# EAGLE board Glove Module- V1_2 (EAGLE 6.6.0)
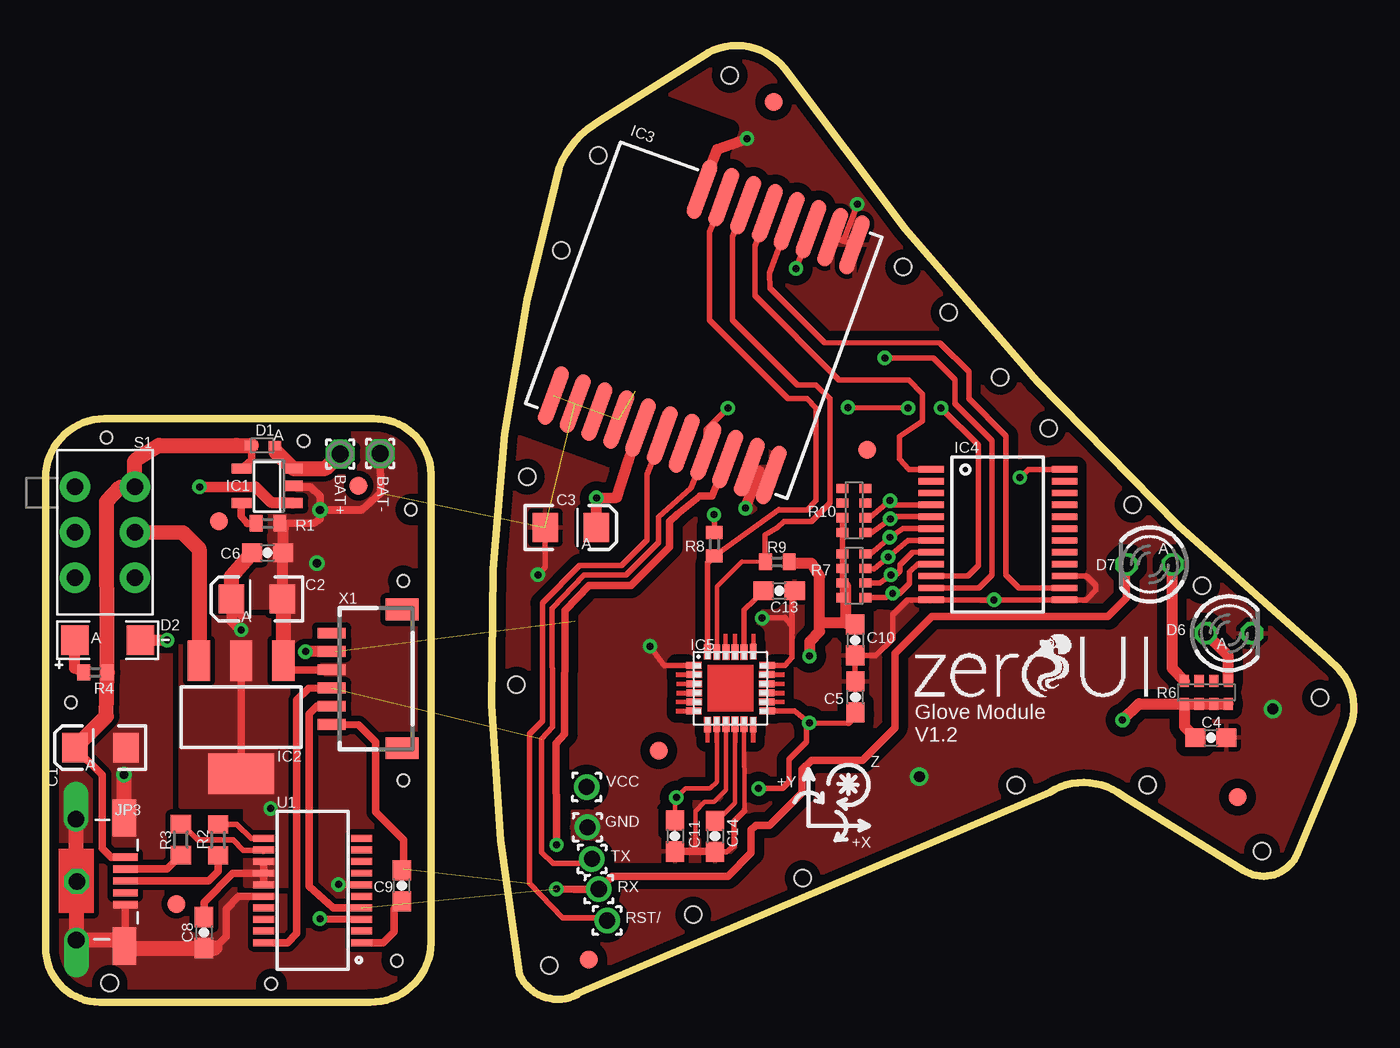
[diagram p0: board, top side]
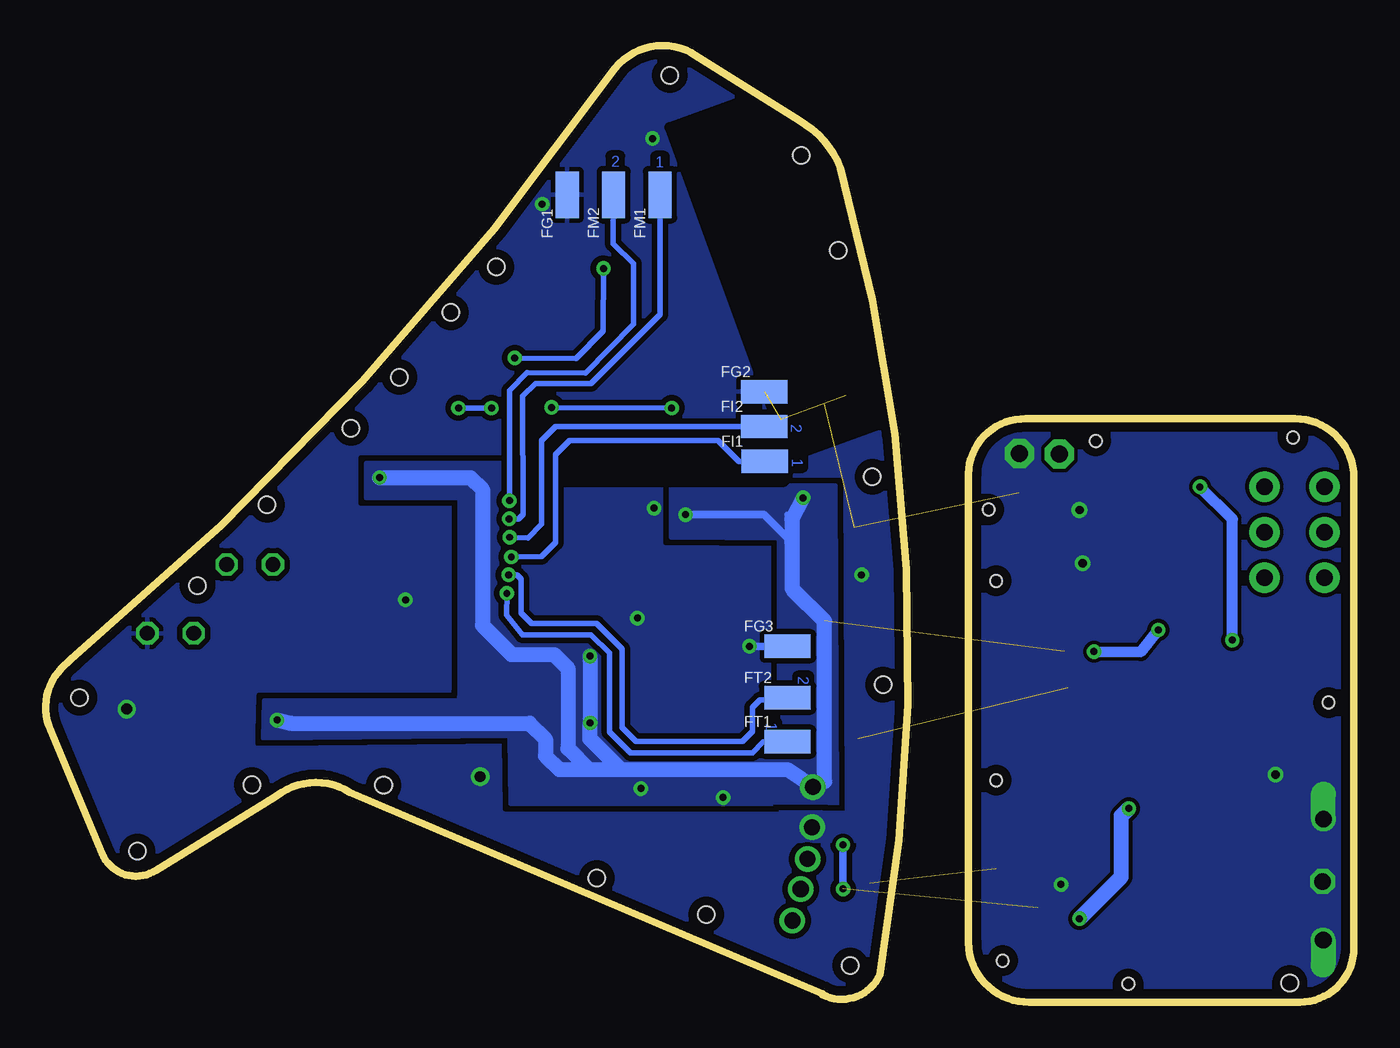
[diagram p1: board, bottom side, seen from below]

Size 71.69 x 52.42 mm. Coordinates in mm from the lower left corner, seen from the top.
Outline: 36.28,52.05 arc-77 40.48,51.2 arc15 70.31,18.77 70.82,18.28 arc-69 71.42,14.9 68.6,8.14 arc-101 65.63,7.24 59.02,11.3 arc71 55.02,11.5 29.12,0.45 29.11,0.41 arc-92 25.98,1.5 arc-26 28.13,45.7 arc-39 30.42,48.33 36.33,52.05
Outline: 21.12,3.26 21.12,28.95 arc90 17.97,31.98 3.23,31.98 arc90 0,28.75 0,2.97 arc90 2.97,0 17.77,0 arc90 21.12,3.26
Copper layers (1*16): Top 0.035mm / dielectric 1.5mm / Bottom 0.035mm
Design rules "8mils": minimum track width 8mil, minimum drill 0.6mm, track to track 8mil, track to pad 8mil, pad to pad 8mil, via to via 8mil, smd to smd 0mil, copper to edge 20mil, drill to drill 10mil, minimum pad ring 8mil, minimum via ring 8mil, stop-mask expansion 0mil, vias tented up to drill 0mil, thermal gap 10mil
Holes 0.66 mm at 19.25,2.27 1.39,16.42 19.61,23.09 12.37,1 3.34,30.94 20.01,27 14.15,30.76 19.61,12.17
Holes 0.91 mm at 3.51,1.04 27.6,2.02 25.8,17.41 26.39,28.8 30.29,46.41 37.48,50.8 49.48,37.8 54.95,31.46 46.99,40.29 52.31,34.25 59.56,27.26 63.37,22.83 69.83,16.69 66.66,8.27 60.38,11.91 53.17,11.88 41.48,6.8 35.48,4.8 28.27,41.21
tRestrict: area 23.9,29.8 to 37.5,50.4; area 52.4,21.9 to 52.9,22.7; area 37.3,9.1 to 38.4,9.8; area 12.2,27.9 to 13,28.8; 4 lines
bRestrict: area 23.9,29.9 to 37.5,50.5; 7 lines

## Footprints (pad centres in the part's own frame; a part is rotated, then mirrored left to right if it is on the bottom)
1,6/0,9 = drill 0.914 pad 1.6 octagon: 1 0,0
EIA3216 = smd 1.4 x 1.6: A 1.4,0; C -1.4,0
0603-CAP = smd 1.1 x 1: 1 -0.85,0; 2 0.85,0
SOD523 = smd 0.7 x 0.5: A 0.7,0; C -0.6,0
LED-1206-BOTTOM = smd 1.5 x 1.6: A -1.8,0; C 1.8,0
LED3MM = drill 0.813 octagon: A -1.27,0; K 1.27,0
WIREPAD-SMD = smd 1.27 x 2.54: 1 0,0
FIDUCIAL-1X2 = smd 1 x 1: 1 0,0
WIREPAD-15MIL = drill 0.889 pad 1.397: 1 0,0
SOT23-5 = smd 0.55 x 1.1: 1 -0.95,-1.3; 2 0,-1.3; 3 0.95,-1.3; 4 0.95,1.5; 5 -0.95,1.5
SOT223 = smd 1.219 x 2.235: 1 -2.311,-3.099; 2 0,-3.099; 3 2.311,-3.099 | smd 3.6 x 2.2: 4 0,3.099
RFD22301 = smd 3.353 x 0.813: 1 0,0; 2 0,-1.27; 3 0,-2.54; 4 0,-3.81; 5 0,-5.08; 6 0,-6.35; 7 0,-7.62; 8 0,-8.89; 9 13.411,-12.675; 10 13.411,-11.405; 11 13.411,-10.135; 12 13.411,-8.865; 13 13.411,-7.595; 14 13.411,-6.325; 15 13.411,-5.055; 16 13.411,-3.785; 17 13.411,-2.515; 18 13.411,-1.245; 19 13.411,0.025
SSOP24 = smd 0.348 x 1.397: 1 -3.575,-3.656; 2 -2.925,-3.656; 3 -2.275,-3.656; 4 -1.625,-3.656; 5 -0.975,-3.656; 6 -0.325,-3.656; 7 0.325,-3.656; 8 0.975,-3.656; 9 1.625,-3.656; 10 2.275,-3.656; 11 2.925,-3.656; 12 3.575,-3.656; 13 3.575,3.656; 14 2.925,3.656; 15 2.275,3.656; 16 1.625,3.656; 17 0.975,3.656; 18 0.325,3.656; 19 -0.325,3.656; 20 -0.975,3.656; 21 -1.625,3.656; 22 -2.275,3.656; 23 -2.925,3.656; 24 -3.575,3.656
QFN.24.4X4 = smd 0.85 x 0.38: 1 -2.007,1.25; 2 -1.975,0.75; 3 -1.975,0.25; 4 -1.975,-0.25; 5 -1.975,-0.75; 6 -2.007,-1.25; 13 2.007,-1.25; 14 1.975,-0.75; 15 1.975,-0.25; 16 1.975,0.25; 17 1.975,0.75; 18 2.007,1.25 | smd 0.38 x 0.85: 7 -1.25,-2.007; 8 -0.75,-1.975; 9 -0.25,-1.975; 10 0.25,-1.975; 11 0.75,-1.975; 12 1.25,-2.007; 19 1.25,2.007; 20 0.75,1.975; 21 0.25,1.975; 22 -0.25,1.975; 23 -0.75,1.975; 24 -1.25,2.007
USB-MICRO-MOLEX-105017-0001 = smd 0.4 x 1.35: 1 -1.34,1.27; 2 -0.69,1.27; 3 -0.04,1.27; 4 0.61,1.27; 5 1.26,1.27 | smd 2.032 x 1.27: P$1 -3.505,1.219; P$6 3.531,1.219 | drill 0.914 octagon: P$2 -0.008,-1.382 | drill 0.914 offset: P$7 -3.434,-1.433; P$8 3.198,-1.418
R0402 = smd 0.7 x 0.9: 1 -0.65,0; 2 0.65,0
R0603 = smd 1 x 1.1: 1 -0.85,0; 2 0.85,0
0603-ARV = smd 0.5 x 0.65: 1 -1.2,-0.625; 2 -0.4,-0.625; 3 0.4,-0.625; 4 1.2,-0.625; 5 1.2,0.625; 6 0.4,0.625; 7 -0.4,0.625; 8 -1.2,0.625
SWITCH-SPDT = drill 0.9 pad 1.676: 1 -2.559,1.579; 2 -0.059,1.579; 3 2.441,1.579; 4 -2.559,-1.721; 5 -0.059,-1.721; 6 2.441,-1.721
SSOP20_L = smd 0.381 x 1.143: 1 -2.857,-2.68; 2 -2.223,-2.68; 3 -1.587,-2.68; 4 -0.953,-2.68; 5 -0.318,-2.68; 6 0.318,-2.68; 7 0.953,-2.68; 8 1.587,-2.68; 9 2.223,-2.68; 10 2.857,-2.68; 11 2.857,2.68; 12 2.223,2.68; 13 1.587,2.68; 14 0.953,2.68; 15 0.318,2.68; 16 -0.318,2.68; 17 -0.953,2.68; 18 -1.587,2.68; 19 -2.223,2.68; 20 -2.857,2.68
SM06B-SRSS-TB = smd 0.6 x 1.55: 1 -2.5,2.975; 2 -1.5,2.975; 3 -0.5,2.975; 4 0.5,2.975; 5 1.5,2.975; 6 2.5,2.975 | smd 1.2 x 1.8: FIT@1 -3.8,-0.9; FIT@2 3.8,-0.9

## Placement (x,y rotation side)
BAT+  Bat+  [1,6/0,9]  16.13,30.04 270 top
BAT-  Bat-  [1,6/0,9]  18.33,30.07 270 top
C1  10uF  [EIA3216]  3,13.94 180 top
C2  10uF  [EIA3216]  11.58,22.1 180 top
C3  10uF  [EIA3216]  28.78,26.01 0 top
C4  0.1uF  [0603-CAP]  63.86,14.5 0 top
C5  0.1uF  [0603-CAP]  44.38,16.73 90 top
C6  0.1uF  [0603-CAP]  12.17,24.63 0 top
C8  0.1uF  [0603-CAP]  8.68,3.81 270 top
C9  0.1uF  [0603-CAP]  19.52,6.38 90 top
C10  0.1uF  [0603-CAP]  44.36,19.85 270 top
C11  10nF  [0603-CAP]  34.48,9.1 270 top
C13  2.2nF  [0603-CAP]  40.2,22.55 0 top
C14  0.1uF  [0603-CAP]  36.68,9.09 270 top
D1  PMEG3005EB  [SOD523]  11.87,30.52 0 top
D2  Green  [LED-1206-BOTTOM]  3.4,19.84 0 top
D6  Green  [LED3MM]  64.85,20.22 0 top
D7  Red  [LED3MM]  60.5,23.99 180 top
FG1  [WIREPAD-SMD]  43.1,44.25 0 bottom
FG2  [WIREPAD-SMD]  32.31,33.45 270 bottom
FG3  [WIREPAD-SMD]  31.04,19.51 270 bottom
FI1  [WIREPAD-SMD]  32.28,29.64 270 bottom
FI2  [WIREPAD-SMD]  32.31,31.55 270 bottom
FID1  FIDUCIAL1X2  [FIDUCIAL-1X2]  17.14,28.3 270 top
FID2  FIDUCIAL1X2  [FIDUCIAL-1X2]  7.16,5.38 270 top
FID3  FIDUCIAL1X2  [FIDUCIAL-1X2]  65.33,11.23 0 top
FID4  FIDUCIAL1X2  [FIDUCIAL-1X2]  33.59,13.78 270 top
FID5  FIDUCIAL1X2  [FIDUCIAL-1X2]  9.5,26.34 0 top
FID6  FIDUCIAL1X2  [FIDUCIAL-1X2]  39.9,49.35 0 top
FID7  FIDUCIAL1X2  [FIDUCIAL-1X2]  29.77,2.34 0 top
FID8  FIDUCIAL1X2  [FIDUCIAL-1X2]  45.01,30.28 0 top
FM1  [WIREPAD-SMD]  38.02,44.25 0 bottom
FM2  [WIREPAD-SMD]  40.56,44.25 0 bottom
FT1  [WIREPAD-SMD]  31.04,14.27 270 bottom
FT2  [WIREPAD-SMD]  31.04,16.69 270 bottom
GND  [WIREPAD-15MIL]  29.69,9.58 0 top
IC1  MCP73831  [SOT23-5]  12.24,28.3 90 top
IC2  AZ1117CH-3.3TRG1  [SOT223]  10.72,15.62 180 top
IC3  RF22301  [RFD22301]  44.32,41.5 250 top
IC4  MUX-74HC4067SMD  [SSOP24]  52.17,25.63 270 top
IC5  MPU-6050  [QFN.24.4X4]  37.53,17.2 0 top
JP3  USB-CON-5PIN-105017-0001  [USB-MICRO-MOLEX-105017-0001]  3.1,6.6 270 top
R1  10k  [R0402]  12.19,26.24 180 top
R2  27E  [R0603]  9.45,8.89 270 top
R3  27E  [R0603]  7.41,8.9 270 top
R4  10k  [R0402]  2.73,18.07 0 top
R6  330E  [0603-ARV]  63.61,16.98 180 top
R7  150k  [0603-ARV]  44.3,23.37 90 top
R8  10k  [R0402]  36.65,25.1 90 top
R9  10k  [R0402]  40.1,24.13 0 top
R10  150k  [0603-ARV]  44.3,26.95 90 top
RST/  [WIREPAD-15MIL]  30.77,4.48 0 top
RX  [WIREPAD-15MIL]  30.32,6.2 0 top
S1  [SWITCH-SPDT]  3.32,25.7 270 top
TX  [WIREPAD-15MIL]  29.94,7.85 0 top
U1  FTS31XS-U  [SSOP20_L]  14.63,6.12 90 top
VCC  [WIREPAD-15MIL]  29.65,11.79 0 top
X1  SM06B-SRSS-TB  [SM06B-SRSS-TB]  18.64,17.72 90 top

## Library data of the parts
BAT+ BAT- = wirepad
C1-C3 = SparkFun-Capacitors; PROD_ID: CAP-00811
C4-C6 C8-C11 C13 C14 = SparkFun-Capacitors; PROD_ID: CAP-08604
D1 = diode
D2 = SparkFun-LED
D6 D7 = led
FG1-FG3 FI1 FI2 FM1 FM2 FT1 FT2 GND IC5 RST/ RX S1 TX VCC X1 = AHandimate
FID1-FID8 = SparkFun-Aesthetics
IC1 IC3 JP3 = GeekAmmo
IC2 = SparkFun-PowerIC; PROD_ID: VREG-08170
IC4 = SparkFun-AnalogIC
R1 R4 R8 R9 = rcl
R2 R3 = resistor
R6 R7 R10 = SparkFun-Passives
U1 = SparkFun-DigitalIC; PROD_ID: IC-11524

## Nets
+5V: C1.A D1.C IC1.4 JP3.1 R4.2 S1.1
ACOM: IC3.5 IC4.1
GND: BAT-.1 C1.C C2.C C3.C C4.2 C5.2 C6.2 C8.2 C10.2 C11.2 C13.2 C14.2 D6.K FG1.1 FG2.1 FG3.1 GND.1 IC1.2 IC2.1 IC3.1 IC3.2 IC3.8 IC3.9 IC3.10 IC3.12 IC3.18 IC3.19 IC4.12 IC4.13 IC4.15 IC5.1 IC5.9 IC5.11 IC5.18 JP3.5 JP3.P$1 JP3.P$2 JP3.P$6 JP3.P$7 JP3.P$8 R1.1 U1.6 U1.16 X1.4
I2C_N: IC3.7 IC5.24 R8.1
I2C_P: IC3.6 IC5.23 R9.1
N$1: C9.1 U1.1
N$2: JP3.2 R3.2
N$3: IC1.5 R1.2
N$4: JP3.3 R2.2
N$5: D6.A R6.1
N$6: D7.A R6.4
N$7: IC2.3 S1.2
N$8: BAT+.1 D1.A IC1.3
N$9: FT1.1 IC4.9 R7.1
N$10: C14.1 IC5.10
N$11: C13.1 IC5.20
N$12: FT2.1 IC4.8 R7.2
N$13: FI1.1 IC4.7 R7.3
N$14: FI2.1 IC4.6 R7.4
N$15: FM1.1 IC4.5 R10.1
N$16: FM2.1 IC4.4 R10.2
N$20: D2.A R4.1
N$21: D2.C IC1.1
RST/: C9.2 IC3.14 RST/.1 X1.1
RX/LED: D7.K IC3.17 RX.1 U1.4 X1.2
S1: IC3.3 IC4.11
S2: IC3.4 IC4.14
TX/S0: IC3.16 IC4.10 TX.1 U1.20 X1.3
USB-NEG: R3.1 U1.12
USB-POS: R2.1 U1.11
VCC: C2.A C3.A C4.1 C5.1 C6.1 C8.1 C10.1 C11.1 IC2.2 IC2.4 IC3.13 IC4.24 IC5.8 IC5.13 R6.5 R6.6 R6.7 R6.8 R7.5 R7.6 R7.7 R7.8 R8.2 R9.2 R10.7 R10.8 U1.3 U1.13 U1.14 U1.15 VCC.1 X1.5

## Tracks (layer width: path | path; a pad name or v marks a point on that pad's centre or on a via)
+5V
  Top 0.406: JP3.1 3.59,7.94 3.1,8.43 3.1,12.44 C1.A | D1.C 11.29,29.7 IC1.4
  Top 0.813: C1.A 3.33,15.67 R4.2 3.34,27.43 4.1,28.23 S1.1 4.89,29.67 6.21,30.51 10.46,30.51 D1.C
ACOM
  Top 0.305: IC4.1 47.3,29.18 46.79,29.77 46.79,30.99 48.06,31.85 48.06,33.32 47.29,34.09 43.48,34.09 38.86,38.71 38.86,41.43 IC3.5
GND  (via drill 0.38, 0.38 pad 0.61, 0.46, 0.6)  (5 unrouted)
  Top 0.254: C14.2 36.69,8.23 | IC5.9 37.28,11.62 36.63,10.97 36.12,10.97 35.61,10.46 35.61,8.51 35.36,8.25 | IC5.11 38.29,10.48 38.28,10.59
  Top 0.305: 38.29,10.48 37.73,9.92 37.73,8.57 37.31,8.23 36.69,8.23 | IC5.18 40.03,18.45 40.52,18.45 40.89,18.9 40.9,20.58 | IC3.1 IC3.2 43.73,41.71 v44.48,43.74 | IC5.1 33.89,18.45 v33.12,19.5 | 48.5,22.07 IC4.12 | C3.C 27.38,23.82 v26.97,23.42 | v39.27,21.05 40.51,21.08 40.9,20.58 | 40.9,20.58 40.89,22.04 C13.2 | IC4.15 57.04,23.35 57.56,22.83 57.56,22.58 57.02,22.05 IC4.13 v51.97,22.05 IC4.12 | C5.2 44.36,17.59 C10.2 45.51,19 46.43,19.91 46.43,21.24 47.24,22.05 IC4.12
  Top 0.406: 1.66,6.61 JP3.P$2 1.68,6.61 | 4.32,3.41 JP3.P$6 4.37,3.12 | 1.66,10.11 JP3.P$7 | 4.37,3.12 JP3.5 | 13.02,25.96 R1.1 14.72,26.25 15.04,26.47 v15.04,26.97 | v15.04,26.97 15.04,27.74 14.53,28.24 13.6,28.24 IC1.2 | BAT-.1 18.36,27.91 17.32,26.97 v15.04,26.97 | 12.98,24.45 C6.2 | 13.03,21.64 C2.C | 4.37,3.12 4.53,2.96 | 9.26,2.96 9.88,3.58 9.88,5.08 10.59,5.79 11.94,5.79 U1.16 | U1.6 v16.05,6.45 | X1.4 13.55,18.2 IC2.1 | C11.2 35.36,8.25 C14.2
  Top 0.61: C6.2 13.02,25.96 | C2.C 12.98,24.45 | IC3.8 36.8,46.74 v38.44,47.33 | v38.35,27.08 39.12,29.08
  Top 0.813: 1.66,6.61 JP3.P$7 | 1.68,6.61 JP3.P$8 4.32,3.41 | IC2.1 13.03,21.64 | 4.53,2.96 C8.2 9.26,2.96 | JP3.P$1 4.29,10.13 v4.29,12.47
  Bottom 0.305: FG1.1 43.18,44.35
  Bottom 0.406: v16.05,6.45 16.08,6.45 | v33.12,19.5 FG3.1
  other vias: 14.86,24.05 47.88,12.36 67.25,16.06
  pour Bottom (isolate 0.152, rank 6, no thermals): -0.2,32.05 21.39,32.05 21.39,0.05 -0.2,0.05
  pour Bottom (isolate 0.305, rank 6): 20.37,55.93 20.37,-0.97 76.76,-0.97 76.76,55.93
  pour Top (isolate 0.508, rank 6): 23.16,55.68 23.16,-1.22 79.55,-1.22 79.55,55.68
  pour Top (isolate 0.305, rank 6, no thermals): -0.46,32.05 21.13,32.05 21.13,0.05 -0.46,0.05
  pour Bottom (isolate 0.203, no thermals): 31.46,10.46 31.46,8.81 26.85,8.79 26.85,10.39
  pour Top (isolate 0.203, no thermals): 33.48,10.56 33.48,8.91 28.87,8.88 28.87,10.49
I2C_N
  Top 0.305: IC5.24 36.28,24.08 R8.1 40.19,27 40.18,26.97 41.71,26.97 42.21,27.48 42.21,32.56 41.71,33.07 40.69,33.07 36.37,37.39 36.37,42.21 IC3.7
I2C_P
  Top 0.254: IC5.23 36.78,22.78 38.15,24.15 R9.1 | 39.42,23.91 R9.1 | R9.1 39.44,23.89
  Top 0.305: IC3.6 37.64,41.96 37.64,37.39 41.2,33.83 42.21,33.83 42.98,33.07 42.98,27.37 41.98,26.35 40.45,26.35 40.09,26.01 39.42,25.6 39.42,23.91
N$1
  Top 0.406: C9.1 19.1,5.11 19.1,3.86 18.5,3.26 U1.1
N$2
  Top 0.406: JP3.2 6.65,7.29 R3.2
N$3
  Top 0.406: R1.2 11.05,26.24 10.72,26.64 10.72,27.33 IC1.5
N$4
  Top 0.406: JP3.3 8.93,6.64 9.45,7.16 R2.2
N$5
  Top 0.61: R6.1 64.81,18.99 D6.A
N$6
  Top 0.61: D7.A 61.72,23.3 61.73,18.3 R6.4
N$7
  Top 0.813: S1.2 7.52,25.73 8.41,24.84 IC2.3
N$8
  Top 0.406: 12.62,30.17 D1.A
  Top 0.813: BAT+.1 15.34,29.25 IC1.3 12.62,30.17
N$9  (via drill 0.38 pad 0.61)
  Top 0.305: IC4.9 47.79,24.02 47.33,23.57 47.33,22.95 46.79,22.4 v46.42,22.4 46.04,22.17 R7.1
  Bottom 0.305: FT1.1 32.31,14.27 32.37,14.27 32.96,13.67 39.64,13.66 40.8,14.82 40.8,19.14 41.8,20.14 45.55,20.14 46.42,21.21 v46.42,22.4
N$10
  Top 0.254: 37.79,15.21 IC5.10 37.77,10.92 36.79,9.94 C14.1
N$11
  Top 0.305: C13.1 38.84,22.05 38.28,21.49 IC5.20
N$12  (via drill 0.38 pad 0.61)
  Top 0.305: IC4.8 48.51,24.66 47.5,24.65 46.8,23.96 46.81,23.62 46.62,23.43 v46.32,23.42 45.72,22.96 R7.2
  Bottom 0.305: v46.32,23.42 45.86,23.42 45.63,23.19 45.63,21.32 45.05,20.74 41.49,20.74 40.11,19.36 40.11,15.05 39.34,14.28 33.52,14.28 32.95,14.85 32.95,16.17 32.54,16.57 31.15,16.57 FT2.1
N$13  (via drill 0.38 pad 0.61)
  Top 0.305: IC4.7 47.26,25.3 v46.17,24.4 45.38,23.75 R7.3
  Bottom 0.305: FI1.1 33.71,29.64 34.85,30.78 42.98,30.78 43.74,30.02 43.74,25.2 44.5,24.43 v46.17,24.4
N$14  (via drill 0.38 pad 0.61)
  Top 0.305: IC4.6 46.99,25.96 v46.26,25.48 45.19,24.55 R7.4
  Bottom 0.305: FI2.1 43.74,31.55 44.5,30.78 44.5,26.21 45.26,25.45 v46.26,25.48
N$15  (via drill 0.38 pad 0.61)
  Top 0.305: IC4.5 46.42,26.6 v46.28,26.49 45.28,25.73 R10.1
  Bottom 0.305: FM1.1 38.02,37.67 41.81,33.89 44.85,33.89 45.54,33.21 45.52,26.72 45.77,26.47 v46.28,26.49
N$16  (via drill 0.38 pad 0.61)
  Top 0.305: IC4.4 46.51,27.25 v46.28,27.48 45.17,26.57 R10.2
  Bottom 0.305: v46.28,27.48 46.26,33.53 45.31,34.5 42.11,34.49 39.47,37.16 39.49,40.47 40.58,41.56 FM2.1
N$20
  Top 0.61: R4.1 1.58,18.3 D2.A
N$21  (via drill 0.38)
  Top 0.61: D2.C 5.87,19.84 v6.66,19.84 | v8.43,28.24 11.48,28.25 12.35,27.39 13.51,27.38 IC1.1
  Bottom 0.61: v6.66,19.84 6.65,26.47 v8.43,28.24
RST/  (1 unrouted)
  Top 0.305: IC3.14 32.94,28.93 32.94,25.32 31.55,23.93 29.26,23.93 27.22,21.87 27.23,15.42 26.53,14.69 26.52,6.5 28.33,4.63 30.62,4.62 RST/.1
  Top 0.406: X1.1 17.16,15.2 18.08,14.27 18.1,10.43 19.62,8.91 19.61,7.32 C9.2
RX/LED  (via drill 0.38 pad 0.61)  (1 unrouted)
  Top 0.406: X1.2 14.88,16.23 14.45,15.8 14.45,6.35 15.75,5.18 17.3,5.18 U1.4 | IC3.17 36.53,27.74 35.86,27.74 34.59,26.72 34.18,26.34 34.19,24.95 32.07,22.84 29.79,22.83 28.46,21.46 28.44,14.69 27.98,14.19 v27.99,8.62 | v27.99,6.21 28.96,6.2 RX.1 31.03,6.91 37.39,6.91 38.66,8.18 38.66,9.45 38.91,9.7 39.67,9.7 41.45,11.48 41.45,12.75 41.96,13.26 44.75,13.26 46.53,15.04 46.53,19.1 48.56,21.13 58.22,21.13 59.23,22.15 D7.K
  Bottom 0.406: v27.99,8.62 v27.99,6.21
S1  (via drill 0.38 pad 0.61)
  Top 0.305: IC4.11 51.15,22.7 51.87,23.42 51.87,30.78 49.83,32.82 49.83,34.12 48.66,35.29 v45.98,35.31 | v41.12,40.21 IC3.3
  Bottom 0.305: v45.98,35.31 42.63,35.27 41.14,36.78 v41.12,40.21
S2
  Top 0.305: IC3.4 39.66,39.96 39.68,39.13 42.68,36.14 49.02,36.11 50.6,34.55 50.6,33.07 52.63,31.04 52.63,23.42 53.34,22.7 IC4.14
TX/S0  (via drill 0.38)  (1 unrouted)
  Top 0.305: IC4.10 50.53,23.35 51.1,23.93 51.1,30.53 v49.07,32.56 | v47.26,32.56 v43.96,32.59 | v37.39,32.56 36.18,31.35 IC3.16 35.37,28.17 33.58,26.6 33.58,25.2 31.8,23.42 29.51,23.42 27.75,21.58 27.77,15.07 27.18,14.43 27.18,8.21 27.8,7.6 29.23,7.6 TX.1
  Top 0.406: U1.20 13.26,3.26 13.77,3.77 13.77,16.56 14.41,17.2 X1.3
  Bottom 0.305: v49.07,32.56 v47.26,32.56 | v43.96,32.59 v37.39,32.56
USB-NEG
  Top 0.305: 7.47,9.75 8.33,8.89 10.29,8.89 10.82,8.33 11.94,8.33
  Top 0.406: R3.1 7.47,9.75 | 11.94,8.33 U1.12
USB-POS
  Top 0.305: R2.1 10.48,9.74 11.25,8.97 U1.11
  Top 0.406: U1.11
VCC  (via drill 0.38, 0.38 pad 0.61)  (1 unrouted)
  Top 0.254: C11.1 34.48,10.86 v34.57,11.22 35.06,11.71 36.4,11.71 36.78,12.06 IC5.8 | 39.5,15.95 IC5.13
  Top 0.305: v41.85,15.31 41.05,15.95 39.5,15.95 | v41.85,15.31 43.99,15.29 44.38,15.67 | X1.5 15.87,19.23 | R10.7 R10.8 R7.5 R7.6 R7.7 R7.8 | 40.86,24.05 R9.2 | IC4.24 53.84,29.2 v53.39,28.75 | v39.07,11.71 40.38,11.71 40.73,12.06 40.73,13.3 41.7,14.27 41.7,15.21 v41.85,15.31 | R8.2 36.64,26.7 v36.63,26.72
  Top 0.406: C2.A 10.72,21.15 | IC2.2 IC2.4 | U1.15 U1.14 | U1.14 U1.13 | C8.1 8.68,5.48 10.26,7.06 11.94,7.06 U1.14 | U1.3 v15.04,4.57
  Top 0.61: C3.A 30.18,26.68 v30.18,27.64 31.3,27.66 31.92,29.64 IC3.13 | 15.87,19.23 v14.24,19.21 | v41.86,18.96 41.86,19.75 42.42,20.32 42.42,20.77 | 42.42,20.77 42.42,23.32 41.97,24.05 40.86,24.05 | R6.5 62.41,15.1 C4.1 | 44.38,15.67 C5.1 | C10.1 44.28,20.77 43.84,20.77 | 43.84,20.77 42.42,20.77 | R7.7 43.84,22.8 43.84,20.77 | R6.5 R6.6 R6.7 R6.8 | C2.A 10.18,20.93 v10.72,20.4 | v59.01,15.46 59.91,16.35 R6.5
  Top 0.813: C2.A 10.18,23.35 C6.1 | C5.1 44.48,15.77
  Bottom 0.305: 31.05,26.72 30.8,26.47
  Bottom 0.406: v36.63,26.72 32.32,26.72 30.8,25.2
  Bottom 0.61: v14.24,19.21 11.68,19.2 v10.72,20.4
  Bottom 0.813: v15.04,4.57 12.75,6.86 12.75,10.21 12.53,10.43 v12.33,10.61 | v59.01,15.46 58.24,15.29 45.17,15.29 44.3,14.42 44.3,13.51 43.53,12.75 42.67,12.75 41.95,12.75 | v41.86,18.96 v41.85,15.31 41.86,14.43 40.27,12.84 40.18,12.75 40.1,12.75 | v30.18,27.64 30.8,26.47 30.8,25.2 30.78,22.66 29.01,20.88 29.01,12.09 VCC.1 | 40.1,12.75 31.04,12.76 29.5,11.71 | v53.39,28.75 48.39,28.75 47.76,28.12 47.76,20.65 46.16,19.05 43.82,19.05 43.07,18.3 43.07,13.91 41.95,12.75 | 41.95,12.75 41.87,12.76 40.44,12.76 40.1,12.75
  pour Top (isolate 0.254, rank 5, no thermals): 7.42,21.05 7.42,10.72 10.97,10.72 10.97,6.4 13.26,6.4 13.26,21.05
  pour Bottom (isolate 0.305, rank 4, no thermals): 29.59,10.85 46.22,10.86 46.28,14.6 59.77,14.47 59.71,16.54 49.03,16.53 49.02,17.04 49.02,27.63 54.12,27.63 54.12,29.53 45.66,29.53 45.66,29.42 45.21,29.42 45.21,21.52 40.29,21.52 40.29,14.47 31.52,14.38 31.49,25.4 37.43,25.47 37.43,28.33 28.4,28.33 28.34,10.82

## Text on the board
Bottom: 1 | 2 | 2 | 1 | 2 | 1
tPlace: Z | +Y | +X
tNames: A | A | A | A | A | A | Glove Module / V1.2 | A